# Altium PCB PCB1.PcbDoc
Units mil, origin at the board's own origin, x right, y up, seen from the top; angles counter-clockwise.
Board outline 6000 x 4000 mil, 2 copper layers (Top Layer, Bottom Layer); 47 components, 24 nets, 123 pads, 16 vias.
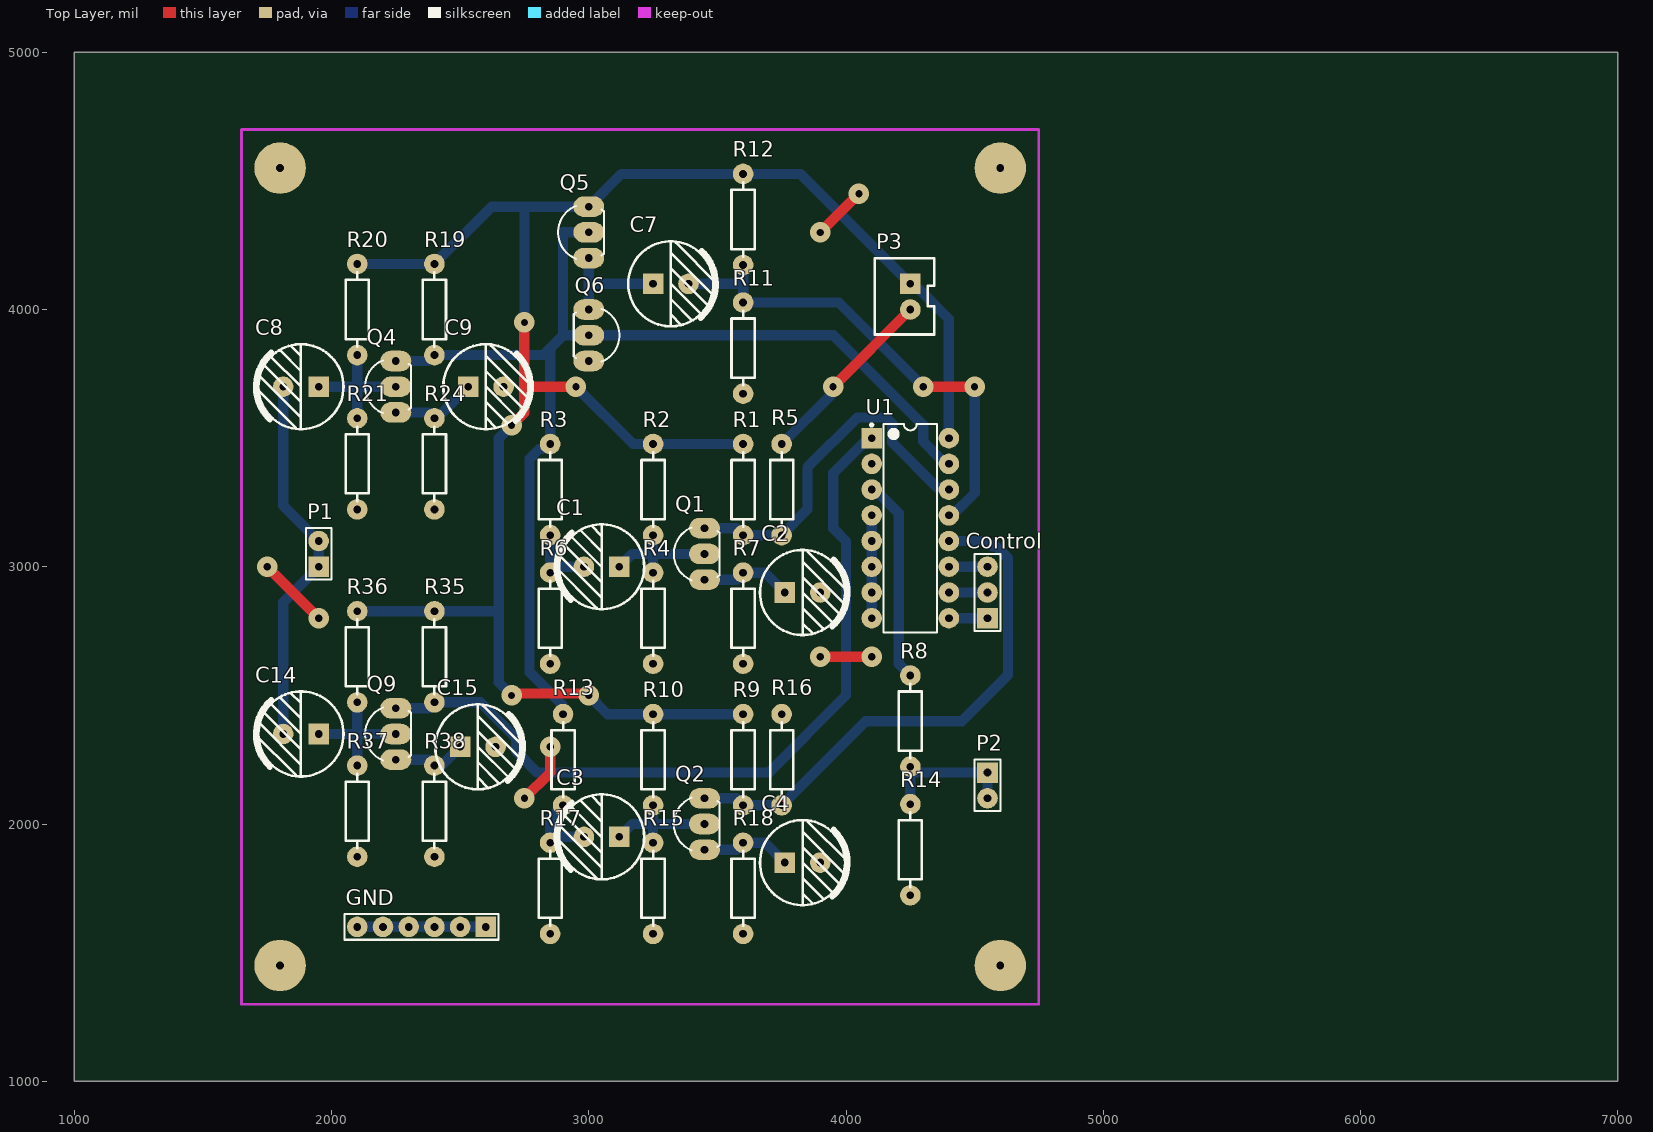
[diagram p0: Top Layer view]
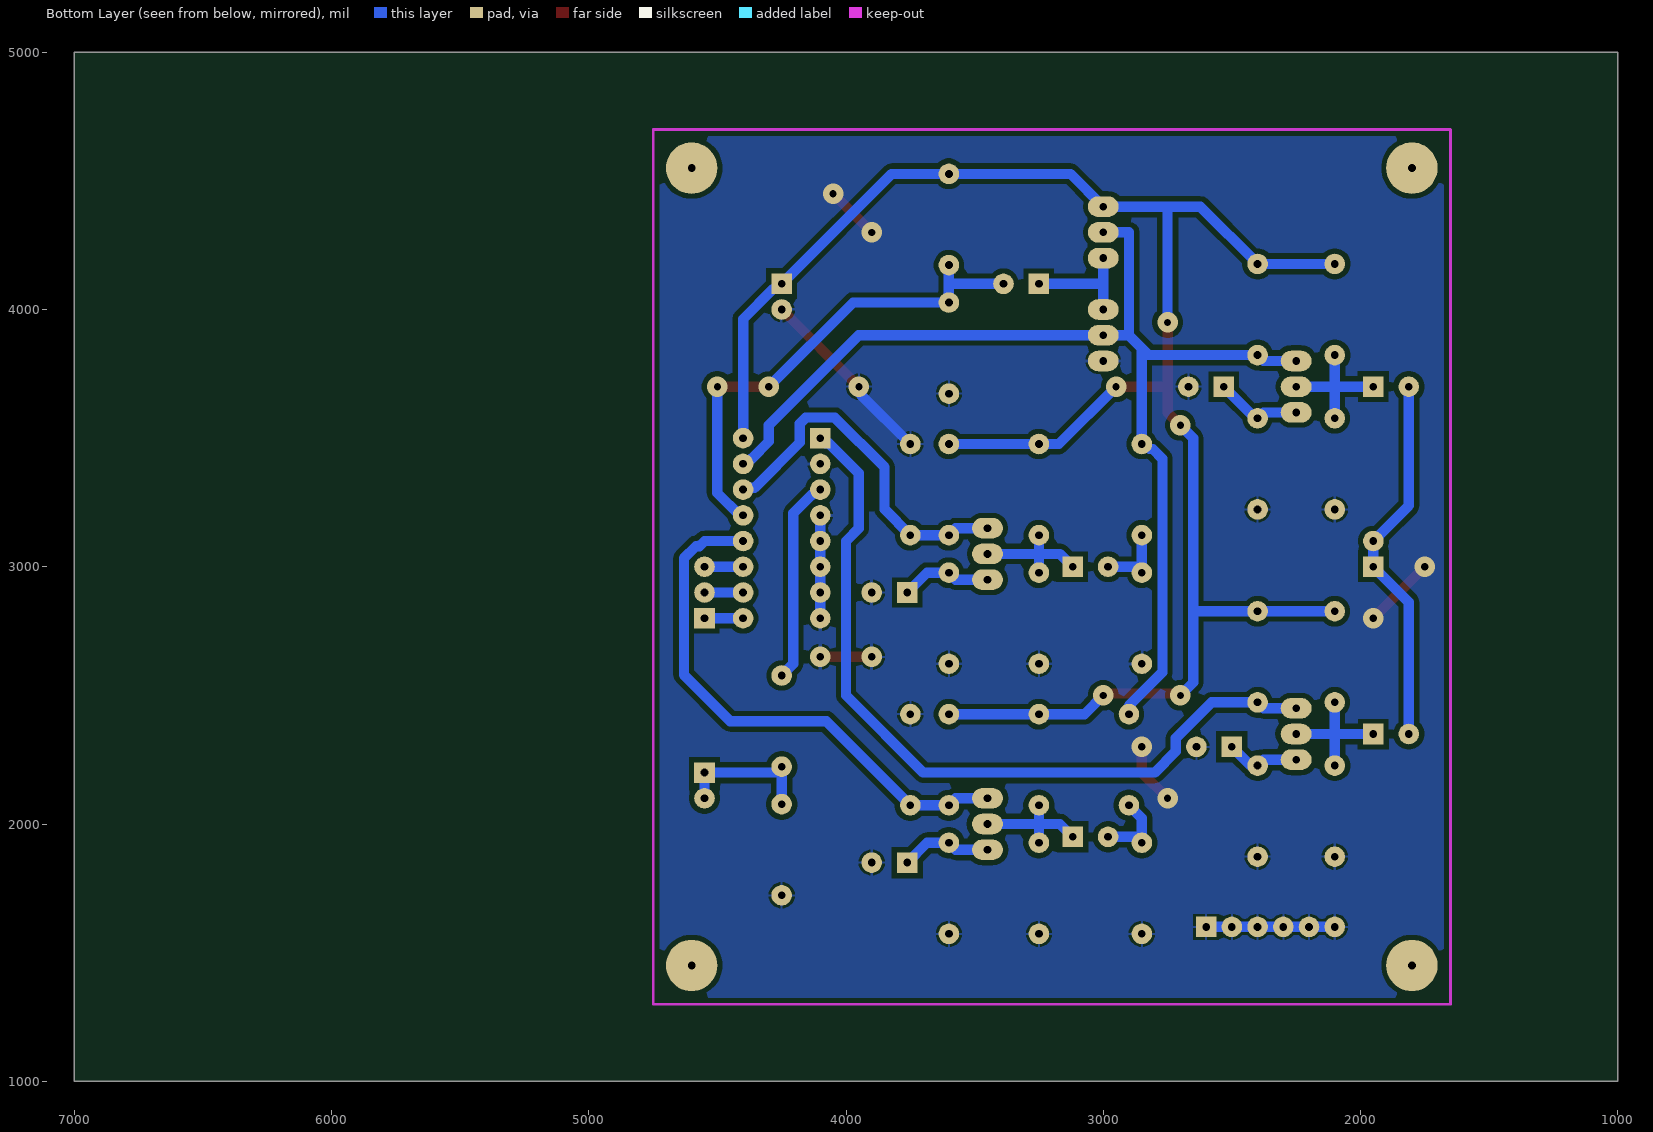
[diagram p1: Bottom Layer view, seen from below]
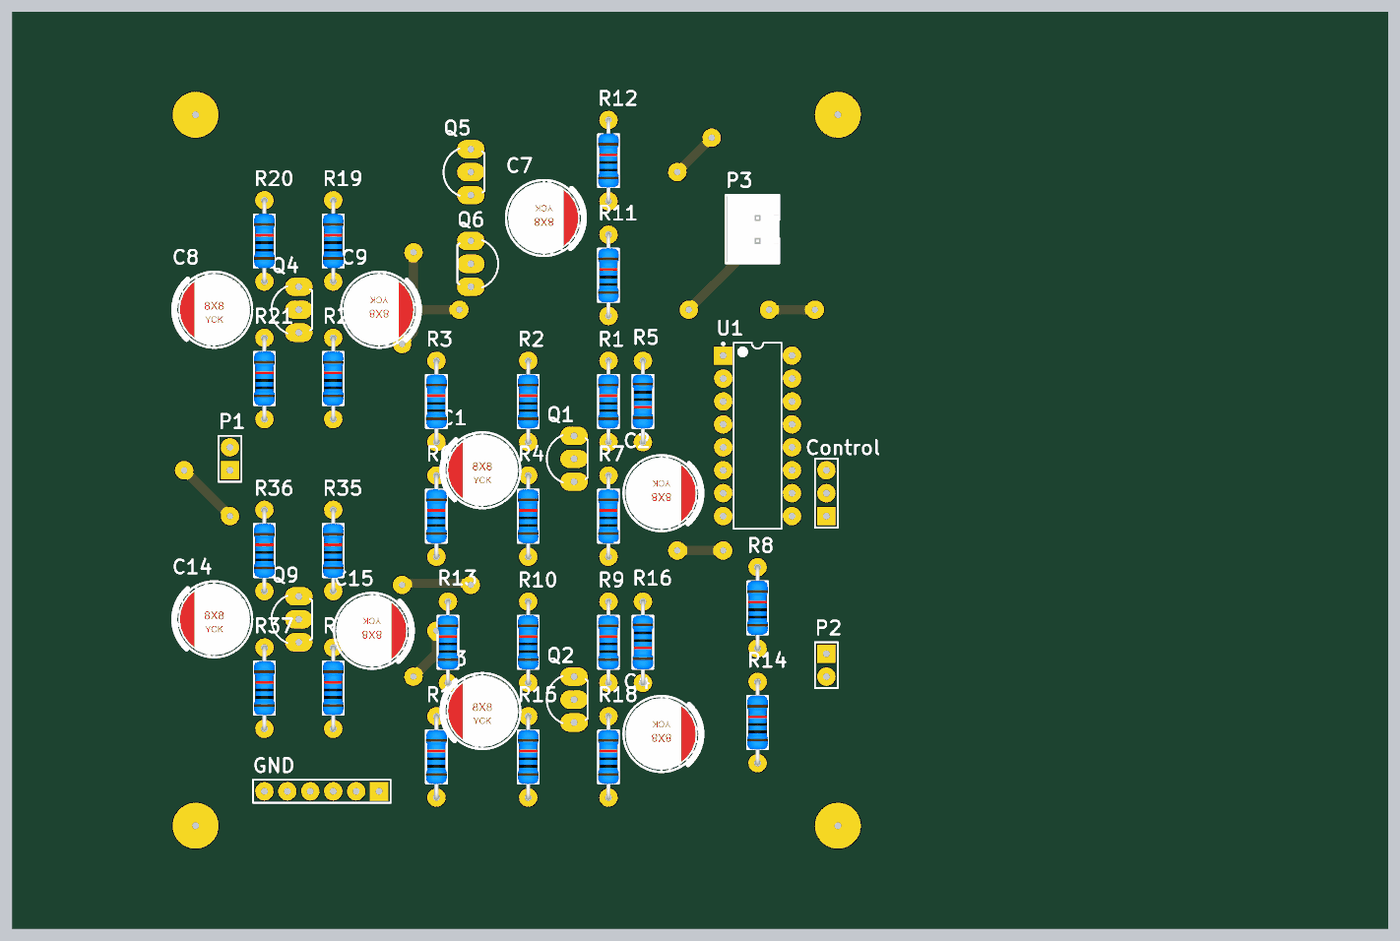
[diagram p2: 3D render of the assembled board from above, using the file's embedded part models]

## Layer stack, top to bottom
Top Solder: solder mask 0.4, Solder Resist, Dk 3.5
Top Layer: signal copper 1.4
Dielectric 1: dielectric 12.6, FR-4, Dk 4.8
Bottom Layer: signal copper 1.4
Bottom Solder: solder mask 0.4, Solder Resist, Dk 3.5

## Board outline
1000,1000 7000,1000 7000,5000 1000,5000

## Design rules (kind name [scope] priority, off if disabled: settings)
Clearance [All] p1: gap=20 ignorepadtopadclearanceinfootprint=FALSE
PolygonConnect [All] p1: connectstyle=Relief reliefconductorwidth=10 reliefentries=4 polygonreliefangle="90 Angle" airgapwidth=10
RoutingVias [All] p1: holewidth=28 width=50 viastyle="Through Hole" minholewidth=28 minwidth=50 maxholewidth=28 maxwidth=50
SolderMaskExpansion [All] p1: expansion=4 istentingtop=FALSE
Width [All] p1: maxlimit=40 minlimit=10 preferedwidth=40
30 further rules are at their usual default settings.

## Components (designator, comment, footprint, x,y, rotation, side; value= is the part's Value field where it differs from the comment)
C1 "22u" "CS 3.5*8*8 - R" 3050,3000 r0 top
C2 "100u" "CS 3.5*8*8 - R" 3831.1,2900 r180 top
C3 "22u" "CS 3.5*8*8 - R" 3050,1950 r0 top
C4 "100u" "CS 3.5*8*8 - R" 3831.1,1850 r180 top
C7 "1u" "CS 3.5*8*8 - R" 3318.9,4100 r180 top
C8 "22u" "CS 3.5*8*8 - R" 1881.1,3700 r0 top
C9 "100u" "CS 3.5*8*8 - R" 2600,3700 r180 top
C14 "22u" "CS 3.5*8*8 - R" 1881.1,2350 r0 top
C15 "100u" "CS 3.5*8*8 - R" 2568.9,2300 r180 top
Control "Header 3" HDR1X3 4550,2800 r90 top
GND "GND" HDR1X6 2600,1600 r180 top
P1 "input" HDR1X2 1950,3000 r90 top
P2 "output" HDR1X2 4550,2200 r270 top
P3 "VCC/GND" XH2.54-LI-2P 4250,4050 r270 top
Q1 "S9013" TO92 3450,3050 r90 top
Q2 "S9013" TO92 3450,2000 r90 top
Q4 "S9013" TO92 2250,3700 r90 top
Q5 "S9013" TO92 3000,4300 r90 top
Q6 "S9012" TO92 3000,3900 r270 top
Q9 "S9013" TO92 2250,2350 r90 top
R1 "2k" "RS 1/4W" 3600,3300 r90 top
R2 "75k" "RS 1/4W" 3250,3300 r90 top
R3 "24k" "RS 1/4W" 2850,3300 r90 top
R4 "10k" "RS 1/4W" 3250,2800 r90 top
R5 "3k" "RS 1/4W" 3750,3300 r270 top
R6 "810" "RS 1/4W" 2850,2800 r90 top
R7 "750" "RS 1/4W" 3600,2800 r90 top
R8 "47k" "RS 1/4W" 4250,2400 r90 top
R9 "2k" "RS 1/4W" 3600,2250 r90 top
R10 "43k" "RS 1/4W" 3250,2250 r90 top
R11 "100k" "RS 1/4W" 3600,3850 r90 top
R12 "100k" "RS 1/4W" 3600,4350 r90 top
R13 "15k" "RS 1/4W" 2900,2250 r90 top
R14 "33k" "RS 1/4W" 4250,1900 r90 top
R15 "10k" "RS 1/4W" 3250,1750 r90 top
R16 "1.5k" "RS 1/4W" 3750,2250 r270 top
R17 "47k" "RS 1/4W" 2850,1750 r90 top
R18 "750" "RS 1/4W" 3600,1750 r90 top
R19 "4.7k" "RS 1/4W" 2400,4000 r90 top
R20 "56k" "RS 1/4W" 2100,4000 r90 top
R21 "10k" "RS 1/4W" 2100,3400 r90 top
R24 "750" "RS 1/4W" 2400,3400 r90 top
R35 "4.3k" "RS 1/4W" 2400,2650 r90 top
R36 "39k" "RS 1/4W" 2100,2650 r90 top
R37 "10k" "RS 1/4W" 2100,2050 r90 top
R38 "750" "RS 1/4W" 2400,2050 r90 top
U1 "CD4051BCN" N16E 4250,3150 r0 top

## Footprints (in the part's own frame and the unit in brackets; to place one, negate y for a bottom-side part, rotate by r counter-clockwise, add the part's x,y. Pads: shape width x height; smd on the part's side, far side on the other; paste and mask are expansions set on the pad)
"CS 3.5*8*8 - R" [mil] "脚距3.5mm , 直径8mm , 高8mm"
  rect 80x80 hole 30: 1(68.9,0)
  round 80 hole 30: 2(-68.9,0)
  silkscreen extent -180,-165 165,165, body extent -157,-157 157,157, height 316
HDR1X2 [mil] "Connector; Header; 2 Position"
  rect 80x80 hole 30: 1(0,0)
  round 80 hole 30: 2(100,0)
  silkscreen extent -50,-50 150,50
HDR1X3 [mil] "Connector; Header; 3 Position"
  rect 80x80 hole 30: 1(0,0)
  round 80 hole 30: 2(100,0) 3(200,0)
  silkscreen extent -50,-50 250,50
HDR1X6 [mil] "Connector; Header; 6 Position"
  rect 80x80 hole 30: 1(0,0)
  round 80 hole 30: 2(100,0) 3(200,0) 4(300,0) 5(400,0) 6(500,0)
  silkscreen extent -50,-50 550,50
N16E [mil] "DIP, 16-Leads, Row Spacing 7.62mm, Pitch 2.54mm, Body 19.3x6.35mm"
  rect 80x80 hole 30: 1(-150,350)
  round 80 hole 30: 2(-150,250) 3(-150,150) 4(-150,50) 5(-150,-50) 6(-150,-150) 7(-150,-250) 8(-150,-350) 9(150,-350) 10(150,-250) 11(150,-150) 12(150,-50) 13(150,50) 14(150,150) 15(150,250) 16(150,350)
  silkscreen extent -155,-406 104,406, body extent -142,-405 142,405, height 200
"RS 1/4W" [mil] "直插色环电阻，脚距9mm，直径2.3mm"
  round 80 hole 30: 1(-177.17,0) 2(177.17,0)
  silkscreen extent -145,-45 145,45, body extent -186,-46 186,46, height 91
TO92 [mil]
  oval 80x120 hole 30: 1(-100,0) 2(0,0) 3(100,0)
  silkscreen extent -103,-58 103,119
XH2.54-LI-2P [mil] "接插件，2P"
  rect 80x80 hole 30: 1(-50,0)
  round 80 hole 30: 2(50,0)
  silkscreen extent -150,-138 147,93, body extent -148,-130 148,94, height 278

## Part data
C1 C2 C3 C4 C7 C8 C9 C14 C15: library part C-CS, "直插固态电容", BOM名称=直插固态电容, 学习资源=www.ooocke.com, 版权归属=源创客
Control: "Header, 3-Pin", LatestRevisionDate=17-Jul-2002, LatestRevisionNote="Re-released for DXP Platform.", Publisher="Altium Limited"
GND: library part "Header 6", "Header, 6-Pin", LatestRevisionDate=17-Jul-2002, LatestRevisionNote="Re-released for DXP Platform.", Publisher="Altium Limited"
P1 P2 P3: library part "Header 2", "Header, 2-Pin", LatestRevisionDate=17-Jul-2002, LatestRevisionNote="Re-released for DXP Platform.", Publisher="Altium Limited"
Q1 Q2 Q4 Q5 Q9: library part 9013-DIP, "低频放大-NPN型", BOM名称=低频放大-NPN型, 学习资源=www.ooocke.com, 属性="50V 0.5A 0.625W", 版权归属=源创客
Q6: library part 9012-DIP, "低频放大-PNP型", BOM名称=低频放大-PNP型, 学习资源=www.ooocke.com, 属性="50V 0.5A 0.625W", 版权归属=源创客
R1 R2 R3 R4 R5 R6 R7 R8 R9 R10 R11 R12 R13 R14 R15 R16 R17 R18 R19 R20 R21 R24 R35 R36 R37 R38: library part R-CRR, "直插色环电阻", BOM名称=色环电阻, 学习资源=www.ooocke.com, 版权归属=源创客
U1: "8-Channel Analog Multiplexer/Demultiplexer", ComponentLink1Description="Manufacturer Link", ComponentLink1URL=http://www.fairchildsemi.com/, ComponentLink2Description=Datasheet, ComponentLink2URL=http://www.fairchildsemi.com/ds/CD%2FCD4052BC.pdf, DatasheetVersion=Jan-1999, LatestRevisionDate=29-May-2009, LatestRevisionNote="Component Body Added.", PackageDescription="DIP, 16-Pin, Row Spacing 7.62 mm, Pitch 2.54 mm", PackageReference=N16E, PackageVersion=2000, Published=17-Jul-2002, Publisher="Altium Limited"

## Free pads (board coordinates)
  round 200 hole 30: 2(1800,4550) 3(1800,1450) 4(4600,1450) 5(4600,4550)

## Via types
v1: diameter 80, hole 28, Top Layer to Bottom Layer, 16 vias

## Nets (pads, with @x,y where several pads share a name; then routed paths per layer and width w, separated by ;. In a path a pad name is that pad's centre, name@x,y a point inside that pad or via, vN(x,y) a via of type N, cw(c..) or ccw(c..) an arc to the next point about the centre after c; other vN are vias at no path point)
+12: P3.1 Q5.3 R1.2 R2.2 R9.2 R10.2 R12.2 R19.2 R20.2 R35.2 R36.2 U1.16 | length 7533.4
  Top Layer w40: v1(2700,2500) 2707.17,2507.17 2992.83,2507.17 v1(3000,2500) ; v1(2700,3550) 2748.9,3598.9 2748.9,3700 ; v1(2750,3950) 2748.9,3948.9 2748.9,3700 ; v1(2950,3700) 2748.9,3700
  Bottom Layer w40: R36.2 R35.2 2650,2827.17 ; R20.2 R19.2 2622.83,4400 2750,4400 ; v1(2700,2500) 2650,2550 2650,2827.17 ; v1(2700,3550) 2650,3500 2650,2827.17 ; v1(2750,3950) 2750,4400 ; v1(2950,3700) 3172.83,3477.17 R2.2 R1.2 ; v1(3000,2500) 3072.83,2427.17 R9.2 ; U1.16 4400,3963.14 4283.14,4080 4270,4080 P3.1 3822.83,4527.17 R12.2 3127.17,4527.17 Q5.3 2750,4400
GND: C2.2 C4.2 C9.2 C15.2 GND.1 GND.2 GND.3 GND.4 GND.5 GND.6 P3.2 Q6.3 R4.1 R5.1 R6.1 R7.1 R11.1 R14.1 R15.1 R16.1 R17.1 R18.1 R21.1 R24.1 R37.1 R38.1 U1.2 U1.4 U1.5 U1.6 U1.7 U1.8 | length 2584.8
  Top Layer w40: v1(1750,3000) v1(1950,2800) ; v1(2750,2100) 2850,2200 v1(2850,2300) ; v1(3900,2650) v1(4100,2650) ; v1(3900,4300) v1(4050,4450) ; v1(3950,3700) P3.2 ; U1.2@4089.18,3400 U1.2 ; U1.2@4110.82,3407.65 U1.2@4118.48,3407.65
  Bottom Layer w40: GND.6 GND.5 GND.4 GND.3 GND.2 GND.1 ; R5.1 3942.35,3669.51 3942.35,3692.35 v1(3950,3700) ; U1.8 U1.7 U1.6 U1.5 U1.4
NetC1_1: C1.1 Q1.2 R2.1 R4.2 | length 497.5
  Bottom Layer w40: C1.1 3168.9,3050 3250,3050 ; R4.2 3250,3050 ; R2.1 3250,3050 ; Q1.2 3250,3050
NetC1_2: C1.2 R3.1 R6.2 | length 286.2
  Bottom Layer w40: R3.1 R6.2 2872.83,3000 C1.2
NetC2_1: C2.1 Q1.1 R7.2 | length 355.4
  Bottom Layer w40: Q1.1 3572.83,2950 R7.2 3685.04,2977.17 C2.1
NetC3_1: C3.1 Q2.2 R10.1 R15.2 | length 497.5
  Bottom Layer w40: C3.1 3168.9,2000 3250,2000 ; R15.2 3250,2000 ; R10.1 3250,2000 ; Q2.2 3250,2000
NetC3_2: C3.2 R13.1 R17.2 | length 306.9
  Bottom Layer w40: R13.1 2850,2022.83 R17.2 2872.83,1950 C3.2
NetC4_1: C4.1 Q2.1 R18.2 | length 355.4
  Bottom Layer w40: Q2.1 3572.83,1900 R18.2 3685.04,1927.17 C4.1
NetC7_1: C7.1 Q5.1 Q6.1 | length 450
  Bottom Layer w40: Q6.1 3000,4100 ; Q5.1 3000,4100 ; C7.1 3000,4100
NetC7_2: C7.2 R11.2 R12.1 U1.13 | length 1942.5
  Top Layer w40: v1(4300,3700) v1(4500,3700)
  Bottom Layer w40: C7.2 3600,4100 ; R12.1 3600,4100 ; v1(4300,3700) 3972.83,4027.17 R11.2 3600,4100 ; U1.13 4413.14,3200 4500,3286.86 v1(4500,3700)
NetC8_1: C8.1 Q4.2 R20.1 R21.2 | length 545.7
  Bottom Layer w40: C8.1 2100,3700 ; R21.2 2100,3700 ; R20.1 2100,3700 ; Q4.2 2100,3700
NetC8_2: C8.2 C14.2 P1.1 P1.2 | length 1481.4
  Bottom Layer w40: C8.2@1800,3687.8 C8.2 1812.2,3237.8 P1.2 P1.1 1812.2,2862.2 C14.2
NetC9_1: C9.1 Q4.1 R24.2 | length 341.4
  Bottom Layer w40: Q4.1 2377.17,3600 R24.2 2408.27,3577.17 C9.1
NetC14_1: C14.1 Q9.2 R36.1 R37.2 | length 545.7
  Bottom Layer w40: C14.1 2100,2350 ; R37.2 2100,2350 ; R36.1 2100,2350 ; Q9.2 2100,2350
NetC15_1: C15.1 Q9.1 R38.2 | length 289.6
  Bottom Layer w40: Q9.1 2377.17,2250 R38.2 2427.17,2227.17 C15.1
NetControl_1: Control.1 U1.9 | length 150
  Bottom Layer w40: U1.9 Control.1
NetControl_2: Control.2 U1.10 | length 150
  Bottom Layer w40: U1.10 Control.2
NetControl_3: Control.3 U1.11 | length 150
  Bottom Layer w40: U1.11 Control.3
NetP2_1: P2.1 P2.2 R8.1 R14.2 | length 555.1
  Bottom Layer w40: R14.2 R8.1 4272.83,2200 P2.1 P2.2
NetQ1_3: Q1.3 R1.1 R5.2 U1.14 | length 1405.5
  Bottom Layer w40: Q1.3 3572.83,3150 R1.1 R5.2 3850,3222.83 3850,3386.57 4043.43,3580 4156.57,3580 4180,3556.57 4180,3483.14 4355.48,3307.65 4392.35,3307.65 U1.14
NetQ2_3: Q2.3 R9.1 R16.2 U1.12 | length 2112.2
  Bottom Layer w40: Q2.3 3572.83,2100 R9.1 R16.2 4077.17,2400 4450,2400 4630,2580 4630,3033.14 4583.14,3080 4570,3080 4550,3100 U1.12
NetQ4_3: Q4.3 Q5.2 Q6.2 R3.2 R13.2 R19.1 U1.15 | length 4458.7
  Bottom Layer w40: Q4.3 2377.17,3800 R19.1 2822.83,3822.83 2850,3850 ; R13.2 2900,2459.7 2770,2589.7 2770,3420 2807.87,3457.87 2819.88,3457.87 2839.18,3477.17 R3.2 2850,3850 ; Q5.2 2900,4300 2900,3900 ; U1.15 4389.18,3400 4369.18,3420 4366.86,3420 4300,3486.86 4300,3550 3950,3900 Q6.2 2900,3900 ; 2850,3850 2900,3900
NetQ9_3: Q9.3 R35.1 U1.1 | length 3117.1
  Bottom Layer w40: Q9.3 2377.17,2450 R35.1 2578.1,2472.83 2717.8,2333.14 2717.8,2282.2 2800,2200 3700,2200 4000,2500 4000,3100 3950,3150 3950,3363.14 4066.86,3480 4080,3480 U1.1
NetR8_2: R8.2 U1.3 | length 792.7
  Bottom Layer w40: U1.3 4110.82,3300 4130.82,3280 4133.14,3280 4204.85,3208.28 4204.85,2622.31 R8.2

## Polygon pours and split planes (outlines as drawn)
GND on Bottom Layer "GND_L02_P003" (solid, remove dead copper, pour order 3): 1650,4700 4750,4700 4750,1300 1650,1300

## Keep-outs
Keep-Out Layer:
  lines w10: 1650,1300 4750,1300 4750,4700 1650,4700 1650,1300